# Altium PCB CR-10 Motherboard.PcbDoc (part 7 of 14)
Units mil, origin at the board's own origin, x right, y up, seen from the top; angles counter-clockwise.
Board outline 3970.48 x 2769.68 mil, 2 copper layers (TopLayer, BottomLayer); 147 components, 128 nets, 667 pads, 614 vias.
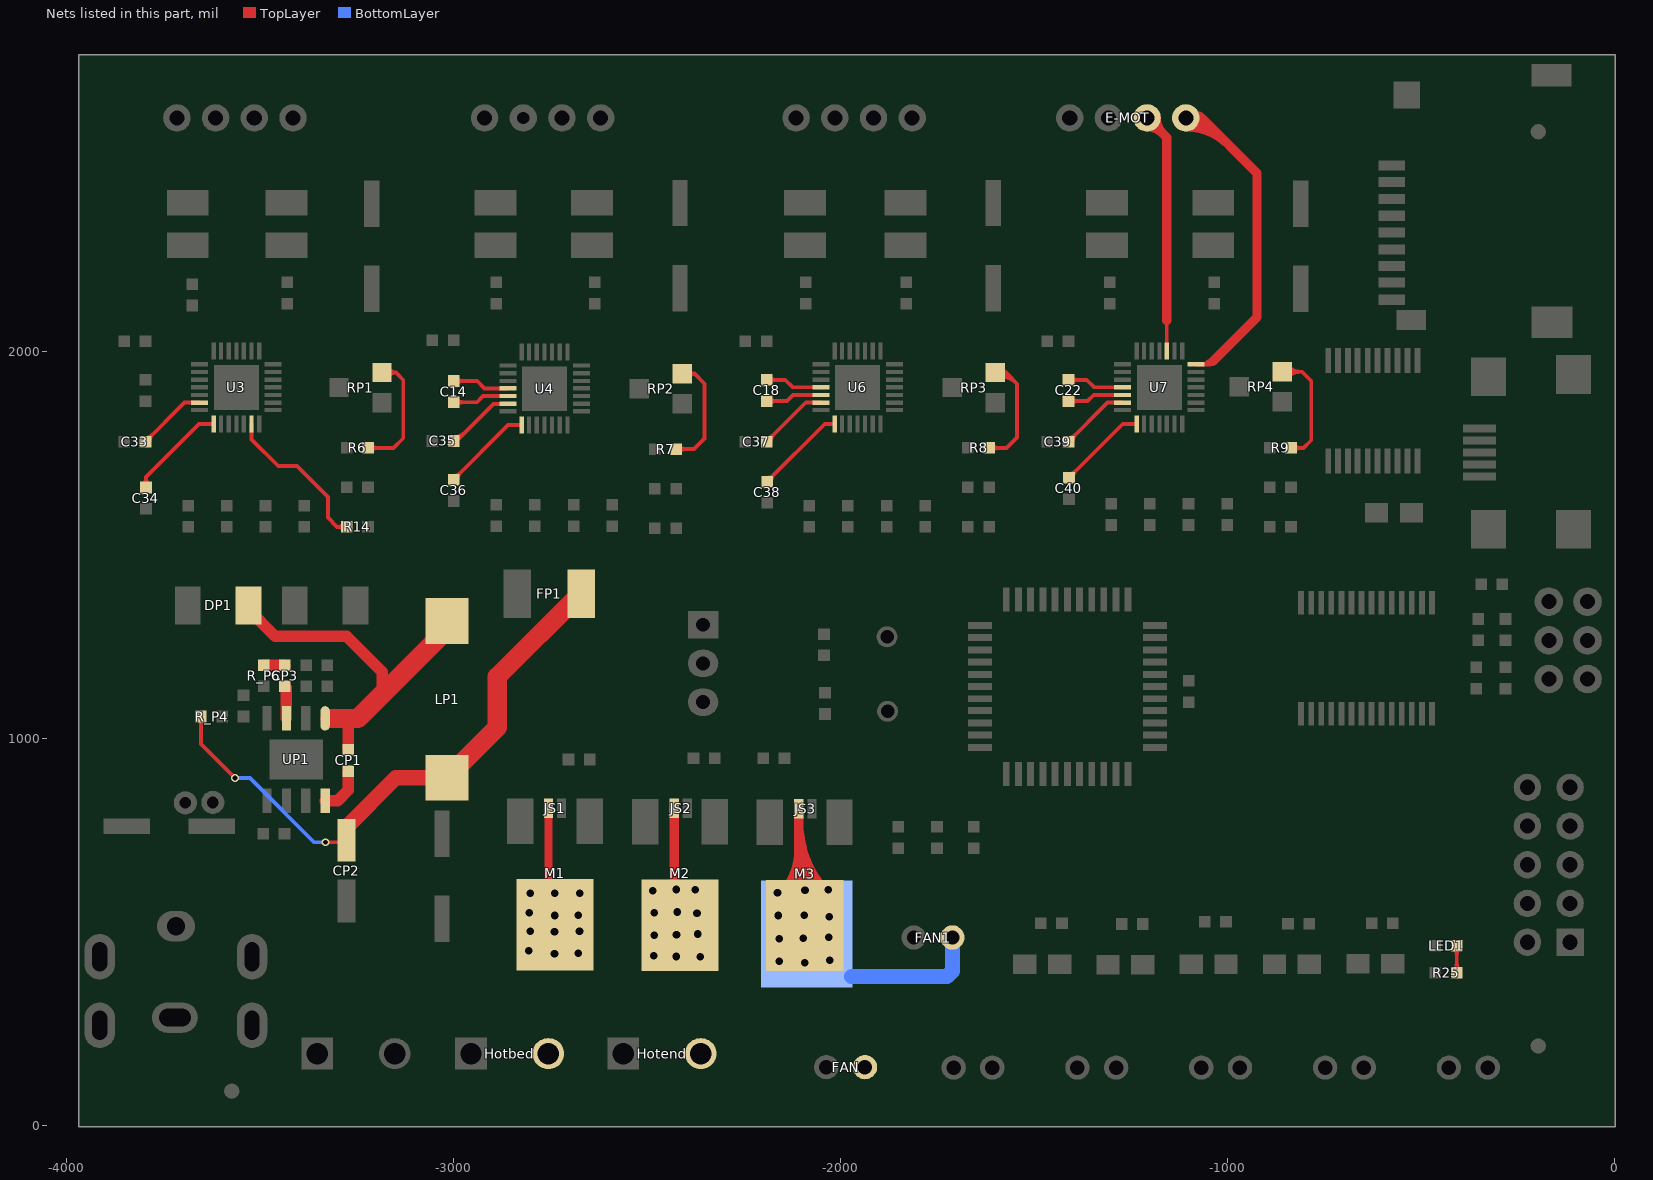
[diagram p7: the nets of this part, all layers, seen from the top]

## Via types
v1: diameter 28, hole 18, TopLayer to BottomLayer, tented both sides, 246 vias
v2: diameter 27.56, hole 19.68, TopLayer to BottomLayer, tented both sides, 196 vias
v3: diameter 20, hole 12, TopLayer to BottomLayer, tented both sides, 124 vias
v4: diameter 27.56, hole 11.81, TopLayer to BottomLayer, tented bottom, 16 vias
v5: diameter 27.56, hole 19.68, TopLayer to BottomLayer, 16 vias
v6: diameter 20, hole 12, TopLayer to BottomLayer, 12 vias
v7: diameter 28, hole 11.81, TopLayer to BottomLayer, tented both sides, 4 vias

## Nets (pads, with @x,y where several pads share a name; then routed paths per layer and width w, separated by ;. In a path a pad name is that pad's centre, name@x,y a point inside that pad or via, vN(x,y) a via of type N, cw(c..) or ccw(c..) an arc to the next point about the centre after c; other vN are vias at no path point) (continued)
NetC14_1: C14.1 U4.4 | length 489.2
  TopLayer w10: C14.1@-2999.54,1924.84 -2938.54,1924.84 -2919.54,1905.84 U4.4@-2859.54,1905.84 ; C14.1@-2992.46,1917.77 cw(c-2975.39,1900.7) -2975.39,1924.84 ; C14.1@-2992.46,1917.77 cw(c-2975.39,1900.7) -2975.39,1924.84 ; C14.1@-2992.46,1917.77 cw(c-2975.39,1900.7) -2975.39,1924.84 ; C14.1@-2992.46,1917.77 cw(c-2975.39,1900.7) -2975.39,1924.84 ; C14.1@-2992.46,1917.77 cw(c-2975.39,1900.7) -2975.39,1924.84 ; C14.1@-2992.46,1917.77 cw(c-2975.39,1900.7) -2975.39,1924.84 ; C14.1@-2992.46,1917.77 cw(c-2975.39,1900.7) -2975.39,1924.84 ; C14.1@-2992.46,1917.77 cw(c-2975.39,1900.7) -2975.39,1924.84 ; C14.1@-2992.46,1917.77 cw(c-2975.39,1900.7) -2975.39,1924.84 ; C14.1@-2992.46,1931.91 ccw(c-2975.39,1948.98) -2975.39,1924.84 ; C14.1@-2992.46,1931.91 ccw(c-2975.39,1948.98) -2975.39,1924.84 ; C14.1@-2992.46,1931.91 ccw(c-2975.39,1948.98) -2975.39,1924.84 ; C14.1@-2992.46,1931.91 ccw(c-2975.39,1948.98) -2975.39,1924.84 ; C14.1@-2992.46,1931.91 ccw(c-2975.39,1948.98) -2975.39,1924.84 ; C14.1@-2992.46,1931.91 ccw(c-2975.39,1948.98) -2975.39,1924.84 ; C14.1@-2992.46,1931.91 ccw(c-2975.39,1948.98) -2975.39,1924.84 ; C14.1@-2992.46,1931.91 ccw(c-2975.39,1948.98) -2975.39,1924.84 ; C14.1@-2992.46,1931.91 ccw(c-2975.39,1948.98) -2975.39,1924.84
NetC14_2: C14.2 U4.5 | length 487.9
  TopLayer w10: C14.2@-2999.54,1869.84 -2939.54,1869.84 -2923.54,1885.84 U4.5@-2859.54,1885.84 ; C14.2@-2992.46,1862.77 cw(c-2975.39,1845.7) -2975.39,1869.84 ; C14.2@-2992.46,1862.77 cw(c-2975.39,1845.7) -2975.39,1869.84 ; C14.2@-2992.46,1862.77 cw(c-2975.39,1845.7) -2975.39,1869.84 ; C14.2@-2992.46,1862.77 cw(c-2975.39,1845.7) -2975.39,1869.84 ; C14.2@-2992.46,1862.77 cw(c-2975.39,1845.7) -2975.39,1869.84 ; C14.2@-2992.46,1862.77 cw(c-2975.39,1845.7) -2975.39,1869.84 ; C14.2@-2992.46,1862.77 cw(c-2975.39,1845.7) -2975.39,1869.84 ; C14.2@-2992.46,1862.77 cw(c-2975.39,1845.7) -2975.39,1869.84 ; C14.2@-2992.46,1862.77 cw(c-2975.39,1845.7) -2975.39,1869.84 ; C14.2@-2992.46,1876.91 ccw(c-2975.39,1893.98) -2975.39,1869.84 ; C14.2@-2992.46,1876.91 ccw(c-2975.39,1893.98) -2975.39,1869.84 ; C14.2@-2992.46,1876.91 ccw(c-2975.39,1893.98) -2975.39,1869.84 ; C14.2@-2992.46,1876.91 ccw(c-2975.39,1893.98) -2975.39,1869.84 ; C14.2@-2992.46,1876.91 ccw(c-2975.39,1893.98) -2975.39,1869.84 ; C14.2@-2992.46,1876.91 ccw(c-2975.39,1893.98) -2975.39,1869.84 ; C14.2@-2992.46,1876.91 ccw(c-2975.39,1893.98) -2975.39,1869.84 ; C14.2@-2992.46,1876.91 ccw(c-2975.39,1893.98) -2975.39,1869.84 ; C14.2@-2992.46,1876.91 ccw(c-2975.39,1893.98) -2975.39,1869.84
NetC18_1: C18.1 U6.4 | length 489.2
  TopLayer w10: C18.1@-2190.62,1927.88 -2142.57,1927.88 -2123.57,1908.88 U6.4@-2050.62,1908.88 ; C18.1@-2183.55,1920.81 cw(c-2166.48,1903.74) -2166.48,1927.88 ; C18.1@-2183.55,1920.81 cw(c-2166.48,1903.74) -2166.48,1927.88 ; C18.1@-2183.55,1920.81 cw(c-2166.48,1903.74) -2166.48,1927.88 ; C18.1@-2183.55,1920.81 cw(c-2166.48,1903.74) -2166.48,1927.88 ; C18.1@-2183.55,1920.81 cw(c-2166.48,1903.74) -2166.48,1927.88 ; C18.1@-2183.55,1920.81 cw(c-2166.48,1903.74) -2166.48,1927.88 ; C18.1@-2183.55,1920.81 cw(c-2166.48,1903.74) -2166.48,1927.88 ; C18.1@-2183.55,1920.81 cw(c-2166.48,1903.74) -2166.48,1927.88 ; C18.1@-2183.55,1920.81 cw(c-2166.48,1903.74) -2166.48,1927.88 ; C18.1@-2183.55,1934.95 ccw(c-2166.48,1952.02) -2166.48,1927.88 ; C18.1@-2183.55,1934.95 ccw(c-2166.48,1952.02) -2166.48,1927.88 ; C18.1@-2183.55,1934.95 ccw(c-2166.48,1952.02) -2166.48,1927.88 ; C18.1@-2183.55,1934.95 ccw(c-2166.48,1952.02) -2166.48,1927.88 ; C18.1@-2183.55,1934.95 ccw(c-2166.48,1952.02) -2166.48,1927.88 ; C18.1@-2183.55,1934.95 ccw(c-2166.48,1952.02) -2166.48,1927.88 ; C18.1@-2183.55,1934.95 ccw(c-2166.48,1952.02) -2166.48,1927.88 ; C18.1@-2183.55,1934.95 ccw(c-2166.48,1952.02) -2166.48,1927.88 ; C18.1@-2183.55,1934.95 ccw(c-2166.48,1952.02) -2166.48,1927.88
NetC18_2: C18.2 U6.5 | length 487.9
  TopLayer w10: C18.2@-2190.62,1872.88 -2138.5,1872.88 -2122.5,1888.88 U6.5@-2050.62,1888.88 ; C18.2@-2183.55,1865.81 cw(c-2166.48,1848.74) -2166.48,1872.88 ; C18.2@-2183.55,1865.81 cw(c-2166.48,1848.74) -2166.48,1872.88 ; C18.2@-2183.55,1865.81 cw(c-2166.48,1848.74) -2166.48,1872.88 ; C18.2@-2183.55,1865.81 cw(c-2166.48,1848.74) -2166.48,1872.88 ; C18.2@-2183.55,1865.81 cw(c-2166.48,1848.74) -2166.48,1872.88 ; C18.2@-2183.55,1865.81 cw(c-2166.48,1848.74) -2166.48,1872.88 ; C18.2@-2183.55,1865.81 cw(c-2166.48,1848.74) -2166.48,1872.88 ; C18.2@-2183.55,1865.81 cw(c-2166.48,1848.74) -2166.48,1872.88 ; C18.2@-2183.55,1865.81 cw(c-2166.48,1848.74) -2166.48,1872.88 ; C18.2@-2183.55,1879.95 ccw(c-2166.48,1897.02) -2166.48,1872.88 ; C18.2@-2183.55,1879.95 ccw(c-2166.48,1897.02) -2166.48,1872.88 ; C18.2@-2183.55,1879.95 ccw(c-2166.48,1897.02) -2166.48,1872.88 ; C18.2@-2183.55,1879.95 ccw(c-2166.48,1897.02) -2166.48,1872.88 ; C18.2@-2183.55,1879.95 ccw(c-2166.48,1897.02) -2166.48,1872.88 ; C18.2@-2183.55,1879.95 ccw(c-2166.48,1897.02) -2166.48,1872.88 ; C18.2@-2183.55,1879.95 ccw(c-2166.48,1897.02) -2166.48,1872.88 ; C18.2@-2183.55,1879.95 ccw(c-2166.48,1897.02) -2166.48,1872.88 ; C18.2@-2183.55,1879.95 ccw(c-2166.48,1897.02) -2166.48,1872.88
NetC22_1: C22.1 U7.4 | length 489.2
  TopLayer w10: C22.1@-1410.62,1927.88 -1363.57,1927.88 -1344.57,1908.88 U7.4@-1270.62,1908.88 ; C22.1@-1403.55,1920.81 cw(c-1386.48,1903.74) -1386.48,1927.88 ; C22.1@-1403.55,1920.81 cw(c-1386.48,1903.74) -1386.48,1927.88 ; C22.1@-1403.55,1920.81 cw(c-1386.48,1903.74) -1386.48,1927.88 ; C22.1@-1403.55,1920.81 cw(c-1386.48,1903.74) -1386.48,1927.88 ; C22.1@-1403.55,1920.81 cw(c-1386.48,1903.74) -1386.48,1927.88 ; C22.1@-1403.55,1920.81 cw(c-1386.48,1903.74) -1386.48,1927.88 ; C22.1@-1403.55,1920.81 cw(c-1386.48,1903.74) -1386.48,1927.88 ; C22.1@-1403.55,1920.81 cw(c-1386.48,1903.74) -1386.48,1927.88 ; C22.1@-1403.55,1920.81 cw(c-1386.48,1903.74) -1386.48,1927.88 ; C22.1@-1403.55,1934.95 ccw(c-1386.48,1952.02) -1386.48,1927.88 ; C22.1@-1403.55,1934.95 ccw(c-1386.48,1952.02) -1386.48,1927.88 ; C22.1@-1403.55,1934.95 ccw(c-1386.48,1952.02) -1386.48,1927.88 ; C22.1@-1403.55,1934.95 ccw(c-1386.48,1952.02) -1386.48,1927.88 ; C22.1@-1403.55,1934.95 ccw(c-1386.48,1952.02) -1386.48,1927.88 ; C22.1@-1403.55,1934.95 ccw(c-1386.48,1952.02) -1386.48,1927.88 ; C22.1@-1403.55,1934.95 ccw(c-1386.48,1952.02) -1386.48,1927.88 ; C22.1@-1403.55,1934.95 ccw(c-1386.48,1952.02) -1386.48,1927.88 ; C22.1@-1403.55,1934.95 ccw(c-1386.48,1952.02) -1386.48,1927.88
NetC22_2: C22.2 U7.5 | length 487.9
  TopLayer w10: C22.2@-1410.62,1872.88 -1361.5,1872.88 -1345.5,1888.88 U7.5@-1270.62,1888.88 ; C22.2@-1403.55,1865.81 cw(c-1386.48,1848.74) -1386.48,1872.88 ; C22.2@-1403.55,1865.81 cw(c-1386.48,1848.74) -1386.48,1872.88 ; C22.2@-1403.55,1865.81 cw(c-1386.48,1848.74) -1386.48,1872.88 ; C22.2@-1403.55,1865.81 cw(c-1386.48,1848.74) -1386.48,1872.88 ; C22.2@-1403.55,1865.81 cw(c-1386.48,1848.74) -1386.48,1872.88 ; C22.2@-1403.55,1865.81 cw(c-1386.48,1848.74) -1386.48,1872.88 ; C22.2@-1403.55,1865.81 cw(c-1386.48,1848.74) -1386.48,1872.88 ; C22.2@-1403.55,1865.81 cw(c-1386.48,1848.74) -1386.48,1872.88 ; C22.2@-1403.55,1865.81 cw(c-1386.48,1848.74) -1386.48,1872.88 ; C22.2@-1403.55,1879.95 ccw(c-1386.48,1897.02) -1386.48,1872.88 ; C22.2@-1403.55,1879.95 ccw(c-1386.48,1897.02) -1386.48,1872.88 ; C22.2@-1403.55,1879.95 ccw(c-1386.48,1897.02) -1386.48,1872.88 ; C22.2@-1403.55,1879.95 ccw(c-1386.48,1897.02) -1386.48,1872.88 ; C22.2@-1403.55,1879.95 ccw(c-1386.48,1897.02) -1386.48,1872.88 ; C22.2@-1403.55,1879.95 ccw(c-1386.48,1897.02) -1386.48,1872.88 ; C22.2@-1403.55,1879.95 ccw(c-1386.48,1897.02) -1386.48,1872.88 ; C22.2@-1403.55,1879.95 ccw(c-1386.48,1897.02) -1386.48,1872.88 ; C22.2@-1403.55,1879.95 ccw(c-1386.48,1897.02) -1386.48,1872.88
NetC33_1: C33.1 U3.6 | length 525.1
  TopLayer w10: C33.1@-3793.62,1767.88 C33.1@-3795.62,1767.88 -3694.62,1868.88 U3.6@-3655.62,1868.88 ; C33.1@-3795.62,1777.88 ccw(c-3795.62,1802.02) -3778.55,1784.95 ; C33.1@-3795.62,1777.88 ccw(c-3795.62,1802.02) -3778.55,1784.95 ; C33.1@-3795.62,1777.88 ccw(c-3795.62,1802.02) -3778.55,1784.95 ; C33.1@-3795.62,1777.88 ccw(c-3795.62,1802.02) -3778.55,1784.95 ; C33.1@-3795.62,1777.88 ccw(c-3795.62,1802.02) -3778.55,1784.95 ; C33.1@-3795.62,1777.88 ccw(c-3795.62,1802.02) -3778.55,1784.95 ; C33.1@-3795.62,1777.88 ccw(c-3795.62,1802.02) -3778.55,1784.95 ; C33.1@-3795.62,1777.88 ccw(c-3795.62,1802.02) -3778.55,1784.95 ; C33.1@-3795.62,1777.88 ccw(c-3795.62,1802.02) -3778.55,1784.95 ; C33.1@-3785.62,1767.88 cw(c-3761.48,1767.88) -3778.55,1784.95 ; C33.1@-3785.62,1767.88 cw(c-3761.48,1767.88) -3778.55,1784.95 ; C33.1@-3785.62,1767.88 cw(c-3761.48,1767.88) -3778.55,1784.95 ; C33.1@-3785.62,1767.88 cw(c-3761.48,1767.88) -3778.55,1784.95 ; C33.1@-3785.62,1767.88 cw(c-3761.48,1767.88) -3778.55,1784.95 ; C33.1@-3785.62,1767.88 cw(c-3761.48,1767.88) -3778.55,1784.95 ; C33.1@-3785.62,1767.88 cw(c-3761.48,1767.88) -3778.55,1784.95 ; C33.1@-3785.62,1767.88 cw(c-3761.48,1767.88) -3778.55,1784.95 ; C33.1@-3785.62,1767.88 cw(c-3761.48,1767.88) -3778.55,1784.95
NetC34_1: C34.1 U3.8 | length 600
  TopLayer w10: C34.1@-3794.45,1649.8 -3794.45,1676.93 -3657.5,1813.88 U3.8@-3619.62,1813.88 ; C34.1@-3801.52,1656.87 ccw(c-3818.59,1673.95) -3794.45,1673.95 ; C34.1@-3801.52,1656.87 ccw(c-3818.59,1673.95) -3794.45,1673.95 ; C34.1@-3801.52,1656.87 ccw(c-3818.59,1673.95) -3794.45,1673.95 ; C34.1@-3801.52,1656.87 ccw(c-3818.59,1673.95) -3794.45,1673.95 ; C34.1@-3801.52,1656.87 ccw(c-3818.59,1673.95) -3794.45,1673.95 ; C34.1@-3801.52,1656.87 ccw(c-3818.59,1673.95) -3794.45,1673.95 ; C34.1@-3801.52,1656.87 ccw(c-3818.59,1673.95) -3794.45,1673.95 ; C34.1@-3801.52,1656.87 ccw(c-3818.59,1673.95) -3794.45,1673.95 ; C34.1@-3801.52,1656.87 ccw(c-3818.59,1673.95) -3794.45,1673.95 ; -3794.45,1673.95 ccw(c-3770.31,1673.95) C34.1@-3787.38,1656.87 ; -3794.45,1673.95 ccw(c-3770.31,1673.95) C34.1@-3787.38,1656.87 ; -3794.45,1673.95 ccw(c-3770.31,1673.95) C34.1@-3787.38,1656.87 ; -3794.45,1673.95 ccw(c-3770.31,1673.95) C34.1@-3787.38,1656.87 ; -3794.45,1673.95 ccw(c-3770.31,1673.95) C34.1@-3787.38,1656.87 ; -3794.45,1673.95 ccw(c-3770.31,1673.95) C34.1@-3787.38,1656.87 ; -3794.45,1673.95 ccw(c-3770.31,1673.95) C34.1@-3787.38,1656.87 ; -3794.45,1673.95 ccw(c-3770.31,1673.95) C34.1@-3787.38,1656.87 ; -3794.45,1673.95 ccw(c-3770.31,1673.95) C34.1@-3787.38,1656.87
NetC35_1: C35.1 U4.6 | length 469.9
  TopLayer w10: C35.1@-2999.54,1769.84 -2992.54,1769.84 -2896.54,1865.84 U4.6@-2859.54,1865.84 ; C35.1@-2999.54,1779.84 ccw(c-2999.54,1820.88) -2970.51,1791.86 ; C35.1@-2999.54,1779.84 ccw(c-2999.54,1820.88) -2970.51,1791.86 ; C35.1@-2999.54,1779.84 ccw(c-2999.54,1820.88) -2970.51,1791.86 ; C35.1@-2999.54,1779.84 ccw(c-2999.54,1820.88) -2970.51,1791.86 ; C35.1@-2999.54,1779.84 ccw(c-2999.54,1820.88) -2970.51,1791.86 ; C35.1@-2999.54,1779.84 ccw(c-2999.54,1820.88) -2970.51,1791.86 ; C35.1@-2999.54,1779.84 ccw(c-2999.54,1820.88) -2970.51,1791.86 ; C35.1@-2999.54,1779.84 ccw(c-2999.54,1820.88) -2970.51,1791.86 ; C35.1@-2999.54,1779.84 ccw(c-2999.54,1820.88) -2970.51,1791.86
NetC36_1: C36.1 U4.8 | length 575.7
  TopLayer w10: C36.1@-2999.54,1669.84 -2858.54,1810.84 U4.8@-2823.54,1810.84 ; C36.1@-2999.54,1679.84 ccw(c-2999.54,1703.98) -2982.46,1686.91 ; C36.1@-2999.54,1679.84 ccw(c-2999.54,1703.98) -2982.46,1686.91 ; C36.1@-2999.54,1679.84 ccw(c-2999.54,1703.98) -2982.46,1686.91 ; C36.1@-2999.54,1679.84 ccw(c-2999.54,1703.98) -2982.46,1686.91 ; C36.1@-2999.54,1679.84 ccw(c-2999.54,1703.98) -2982.46,1686.91 ; C36.1@-2999.54,1679.84 ccw(c-2999.54,1703.98) -2982.46,1686.91 ; C36.1@-2999.54,1679.84 ccw(c-2999.54,1703.98) -2982.46,1686.91 ; C36.1@-2999.54,1679.84 ccw(c-2999.54,1703.98) -2982.46,1686.91 ; C36.1@-2999.54,1679.84 ccw(c-2999.54,1703.98) -2982.46,1686.91 ; C36.1@-2989.54,1669.84 cw(c-2965.39,1669.84) -2982.46,1686.91 ; C36.1@-2989.54,1669.84 cw(c-2965.39,1669.84) -2982.46,1686.91 ; C36.1@-2989.54,1669.84 cw(c-2965.39,1669.84) -2982.46,1686.91 ; C36.1@-2989.54,1669.84 cw(c-2965.39,1669.84) -2982.46,1686.91 ; C36.1@-2989.54,1669.84 cw(c-2965.39,1669.84) -2982.46,1686.91 ; C36.1@-2989.54,1669.84 cw(c-2965.39,1669.84) -2982.46,1686.91 ; C36.1@-2989.54,1669.84 cw(c-2965.39,1669.84) -2982.46,1686.91 ; C36.1@-2989.54,1669.84 cw(c-2965.39,1669.84) -2982.46,1686.91 ; C36.1@-2989.54,1669.84 cw(c-2965.39,1669.84) -2982.46,1686.91
NetC37_1: C37.1 U6.6 | length 523.1
  TopLayer w10: C37.1@-2190.62,1767.88 -2089.62,1868.88 U6.6@-2050.62,1868.88 ; C37.1@-2190.62,1777.88 ccw(c-2190.62,1802.02) -2173.55,1784.95 ; C37.1@-2190.62,1777.88 ccw(c-2190.62,1802.02) -2173.55,1784.95 ; C37.1@-2190.62,1777.88 ccw(c-2190.62,1802.02) -2173.55,1784.95 ; C37.1@-2190.62,1777.88 ccw(c-2190.62,1802.02) -2173.55,1784.95 ; C37.1@-2190.62,1777.88 ccw(c-2190.62,1802.02) -2173.55,1784.95 ; C37.1@-2190.62,1777.88 ccw(c-2190.62,1802.02) -2173.55,1784.95 ; C37.1@-2190.62,1777.88 ccw(c-2190.62,1802.02) -2173.55,1784.95 ; C37.1@-2190.62,1777.88 ccw(c-2190.62,1802.02) -2173.55,1784.95 ; C37.1@-2190.62,1777.88 ccw(c-2190.62,1802.02) -2173.55,1784.95 ; C37.1@-2180.62,1767.88 cw(c-2156.48,1767.88) -2173.55,1784.95 ; C37.1@-2180.62,1767.88 cw(c-2156.48,1767.88) -2173.55,1784.95 ; C37.1@-2180.62,1767.88 cw(c-2156.48,1767.88) -2173.55,1784.95 ; C37.1@-2180.62,1767.88 cw(c-2156.48,1767.88) -2173.55,1784.95 ; C37.1@-2180.62,1767.88 cw(c-2156.48,1767.88) -2173.55,1784.95 ; C37.1@-2180.62,1767.88 cw(c-2156.48,1767.88) -2173.55,1784.95 ; C37.1@-2180.62,1767.88 cw(c-2156.48,1767.88) -2173.55,1784.95 ; C37.1@-2180.62,1767.88 cw(c-2156.48,1767.88) -2173.55,1784.95 ; C37.1@-2180.62,1767.88 cw(c-2156.48,1767.88) -2173.55,1784.95
NetC38_1: C38.1 U6.8 | length 576.4
  TopLayer w10: C38.1@-2189.54,1664.84 -2040.5,1813.88 U6.8@-2016.12,1813.88 ; C38.1@-2189.54,1674.84 ccw(c-2189.54,1698.98) -2172.46,1681.91 ; C38.1@-2189.54,1674.84 ccw(c-2189.54,1698.98) -2172.46,1681.91 ; C38.1@-2189.54,1674.84 ccw(c-2189.54,1698.98) -2172.46,1681.91 ; C38.1@-2189.54,1674.84 ccw(c-2189.54,1698.98) -2172.46,1681.91 ; C38.1@-2189.54,1674.84 ccw(c-2189.54,1698.98) -2172.46,1681.91 ; C38.1@-2189.54,1674.84 ccw(c-2189.54,1698.98) -2172.46,1681.91 ; C38.1@-2189.54,1674.84 ccw(c-2189.54,1698.98) -2172.46,1681.91 ; C38.1@-2189.54,1674.84 ccw(c-2189.54,1698.98) -2172.46,1681.91 ; C38.1@-2189.54,1674.84 ccw(c-2189.54,1698.98) -2172.46,1681.91 ; C38.1@-2179.54,1664.84 cw(c-2155.39,1664.84) -2172.46,1681.91 ; C38.1@-2179.54,1664.84 cw(c-2155.39,1664.84) -2172.46,1681.91 ; C38.1@-2179.54,1664.84 cw(c-2155.39,1664.84) -2172.46,1681.91 ; C38.1@-2179.54,1664.84 cw(c-2155.39,1664.84) -2172.46,1681.91 ; C38.1@-2179.54,1664.84 cw(c-2155.39,1664.84) -2172.46,1681.91 ; C38.1@-2179.54,1664.84 cw(c-2155.39,1664.84) -2172.46,1681.91 ; C38.1@-2179.54,1664.84 cw(c-2155.39,1664.84) -2172.46,1681.91 ; C38.1@-2179.54,1664.84 cw(c-2155.39,1664.84) -2172.46,1681.91 ; C38.1@-2179.54,1664.84 cw(c-2155.39,1664.84) -2172.46,1681.91
NetC39_1: C39.1 U7.6 | length 523.1
  TopLayer w10: C39.1@-1410.62,1767.88 -1309.62,1868.88 U7.6@-1270.62,1868.88 ; C39.1@-1410.62,1777.88 ccw(c-1410.62,1802.02) -1393.55,1784.95 ; C39.1@-1410.62,1777.88 ccw(c-1410.62,1802.02) -1393.55,1784.95 ; C39.1@-1410.62,1777.88 ccw(c-1410.62,1802.02) -1393.55,1784.95 ; C39.1@-1410.62,1777.88 ccw(c-1410.62,1802.02) -1393.55,1784.95 ; C39.1@-1410.62,1777.88 ccw(c-1410.62,1802.02) -1393.55,1784.95 ; C39.1@-1410.62,1777.88 ccw(c-1410.62,1802.02) -1393.55,1784.95 ; C39.1@-1410.62,1777.88 ccw(c-1410.62,1802.02) -1393.55,1784.95 ; C39.1@-1410.62,1777.88 ccw(c-1410.62,1802.02) -1393.55,1784.95 ; C39.1@-1410.62,1777.88 ccw(c-1410.62,1802.02) -1393.55,1784.95 ; C39.1@-1400.62,1767.88 cw(c-1376.48,1767.88) -1393.55,1784.95 ; C39.1@-1400.62,1767.88 cw(c-1376.48,1767.88) -1393.55,1784.95 ; C39.1@-1400.62,1767.88 cw(c-1376.48,1767.88) -1393.55,1784.95 ; C39.1@-1400.62,1767.88 cw(c-1376.48,1767.88) -1393.55,1784.95 ; C39.1@-1400.62,1767.88 cw(c-1376.48,1767.88) -1393.55,1784.95 ; C39.1@-1400.62,1767.88 cw(c-1376.48,1767.88) -1393.55,1784.95 ; C39.1@-1400.62,1767.88 cw(c-1376.48,1767.88) -1393.55,1784.95 ; C39.1@-1400.62,1767.88 cw(c-1376.48,1767.88) -1393.55,1784.95 ; C39.1@-1400.62,1767.88 cw(c-1376.48,1767.88) -1393.55,1784.95
NetC40_1: C40.1 U7.8 | length 572.2
  TopLayer w10: C40.1@-1409.45,1674.8 -1270.37,1813.88 U7.8@-1236.12,1813.88 ; C40.1@-1409.45,1684.8 ccw(c-1409.45,1708.95) -1392.38,1691.87 ; C40.1@-1409.45,1684.8 ccw(c-1409.45,1708.95) -1392.38,1691.87 ; C40.1@-1409.45,1684.8 ccw(c-1409.45,1708.95) -1392.38,1691.87 ; C40.1@-1409.45,1684.8 ccw(c-1409.45,1708.95) -1392.38,1691.87 ; C40.1@-1409.45,1684.8 ccw(c-1409.45,1708.95) -1392.38,1691.87 ; C40.1@-1409.45,1684.8 ccw(c-1409.45,1708.95) -1392.38,1691.87 ; C40.1@-1409.45,1684.8 ccw(c-1409.45,1708.95) -1392.38,1691.87 ; C40.1@-1409.45,1684.8 ccw(c-1409.45,1708.95) -1392.38,1691.87 ; C40.1@-1409.45,1684.8 ccw(c-1409.45,1708.95) -1392.38,1691.87 ; C40.1@-1399.45,1674.8 cw(c-1375.31,1674.8) -1392.38,1691.87 ; C40.1@-1399.45,1674.8 cw(c-1375.31,1674.8) -1392.38,1691.87 ; C40.1@-1399.45,1674.8 cw(c-1375.31,1674.8) -1392.38,1691.87 ; C40.1@-1399.45,1674.8 cw(c-1375.31,1674.8) -1392.38,1691.87 ; C40.1@-1399.45,1674.8 cw(c-1375.31,1674.8) -1392.38,1691.87 ; C40.1@-1399.45,1674.8 cw(c-1375.31,1674.8) -1392.38,1691.87 ; C40.1@-1399.45,1674.8 cw(c-1375.31,1674.8) -1392.38,1691.87 ; C40.1@-1399.45,1674.8 cw(c-1375.31,1674.8) -1392.38,1691.87 ; C40.1@-1399.45,1674.8 cw(c-1375.31,1674.8) -1392.38,1691.87
NetCP1_1: CP1.1 UP1.8 | length 120.3
  TopLayer w30: UP1.8@-3331.54,840.54 -3298.83,840.54 -3271.54,867.84 CP1.1@-3271.54,916.84
NetCP1_2: CP1.2 DP1.2 LP1.2 UP1.1 | length 969.9
  TopLayer w30: DP1.2@-3529.06,1344.84 -3529.06,1333.36 -3460.54,1264.84 -3275.54,1264.84 -3183.54,1172.84 -3183.54,1115.84 ; CP1.2@-3271.54,971.84 -3271.54,1041.84
  TopLayer w50: -3318.54,1052.84 -3246.54,1052.84 -3183.54,1115.84 -3016.54,1282.84 LP1.2@-3016.54,1304.96
NetCP2_1: CP2.1 FP1.1 LP1.1 R_P4.2 | length 1512.6
  TopLayer w10: R_P4.2@-3652.54,1057.84 -3652.54,986.84 v3(-3564.54,898.84) ; v3(-3330.54,732.84) CP2.1@-3282.28,732.84
  TopLayer w40: CP2.1@-3276.54,738.58 -3276.54,771.84 -3148.54,899.84 LP1.1@-3016.54,899.84
  TopLayer w50: LP1.1@-3016.54,899.84 -2886.54,1029.84 -2886.54,1160.46 -2672,1375 FP1.1@-2670,1375
  BottomLayer w10: v3(-3564.54,898.84) -3525.54,898.84 -3359.54,732.84 v3(-3330.54,732.84)
NetCP3_1: CP3.1 R_P6.1 | length 55
  TopLayer w30: R_P6.1@-3490.54,1190.84 CP3.1@-3435.54,1190.84
NetCP3_2: CP3.2 UP1.3 | length 78.7
  TopLayer w30: UP1.3@-3431.54,1053.14 CP3.2@-3431.54,1131.84
NetE-MOT_3: E-MOT.3 U7.24 | length 1056.2
  TopLayer w10: U7.24@-1156.62,2017.56 -1156.62,2080.84
  TopLayer w23.62: E-MOT.3@-1207.49,2604.84 -1156.62,2553.98 -1156.62,2442.84 -1156.62,2080.84 ; E-MOT.3@-1207.49,2581.22 cw(c-1207.49,2524.19) -1167.16,2564.52 ; E-MOT.3@-1207.49,2581.22 cw(c-1207.49,2524.19) -1167.16,2564.52 ; E-MOT.3@-1207.49,2581.22 cw(c-1207.49,2524.19) -1167.16,2564.52 ; E-MOT.3@-1207.49,2581.22 cw(c-1207.49,2524.19) -1167.16,2564.52 ; E-MOT.3@-1207.49,2581.22 cw(c-1207.49,2524.19) -1167.16,2564.52 ; E-MOT.3@-1183.87,2604.84 ccw(c-1126.84,2604.84) -1167.16,2564.52 ; E-MOT.3@-1183.87,2604.84 ccw(c-1126.84,2604.84) -1167.16,2564.52 ; E-MOT.3@-1183.87,2604.84 ccw(c-1126.84,2604.84) -1167.16,2564.52 ; E-MOT.3@-1183.87,2604.84 ccw(c-1126.84,2604.84) -1167.16,2564.52 ; E-MOT.3@-1183.87,2604.84 ccw(c-1126.84,2604.84) -1167.16,2564.52
NetE-MOT_4: E-MOT.4 U7.21 | length 2198.1
  TopLayer w10: U7.21@-1080.62,1967.88 -1044.54,1967.88 ccw(c-1045.02,1978.23) -1034.67,1978.71 ; -1056.54,1967.88 cw(c-1044.05,1962.36) -1038.54,1974.84
  TopLayer w23.62: E-MOT.4@-1092.47,2586.61 cw(c-1070.5,2559.93) -1046.06,2584.37 ; -1064.46,2602.77 ccw(c-1087.12,2580.11) E-MOT.4@-1107.49,2604.84 ; -1038.54,1974.84 -923.54,2089.84 -923.54,2413.84 -923.54,2461.84 -1066.54,2604.84 ; E-MOT.4@-1107.49,2581.22 cw(c-1107.49,2425.32) -997.25,2535.56 ; E-MOT.4@-1107.49,2581.22 cw(c-1107.49,2425.32) -997.25,2535.56 ; E-MOT.4@-1107.49,2581.22 cw(c-1107.49,2425.32) -997.25,2535.56 ; E-MOT.4@-1107.49,2581.22 cw(c-1107.49,2425.32) -997.25,2535.56 ; E-MOT.4@-1107.49,2581.22 cw(c-1107.49,2425.32) -997.25,2535.56 ; E-MOT.4@-1107.49,2604.84 cw(c-1107.49,2505.97) -1037.58,2575.88 ; E-MOT.4@-1107.49,2604.84 cw(c-1107.49,2505.97) -1037.58,2575.88 ; E-MOT.4@-1107.49,2604.84 cw(c-1107.49,2505.97) -1037.58,2575.88 ; E-MOT.4@-1107.49,2604.84 cw(c-1107.49,2505.97) -1037.58,2575.88 ; E-MOT.4@-1107.49,2604.84 cw(c-1107.49,2505.97) -1037.58,2575.88 ; E-MOT.4@-1107.49,2604.84 -1066.54,2604.84 ; E-MOT.4@-1087.04,2593.02 cw(c-1066.54,2581.16) -1066.54,2604.84 ; E-MOT.4@-1087.04,2593.02 cw(c-1066.54,2581.16) -1066.54,2604.84 ; E-MOT.4@-1087.04,2593.02 cw(c-1066.54,2581.16) -1066.54,2604.84 ; E-MOT.4@-1087.04,2593.02 cw(c-1066.54,2581.16) -1066.54,2604.84 ; E-MOT.4@-1087.04,2593.02 cw(c-1066.54,2581.16) -1066.54,2604.84 ; E-MOT.4@-1087.04,2616.67 ccw(c-1066.54,2628.53) -1066.54,2604.84 ; E-MOT.4@-1087.04,2616.67 ccw(c-1066.54,2628.53) -1066.54,2604.84 ; E-MOT.4@-1087.04,2616.67 ccw(c-1066.54,2628.53) -1066.54,2604.84 ; E-MOT.4@-1087.04,2616.67 ccw(c-1066.54,2628.53) -1066.54,2604.84 ; E-MOT.4@-1087.04,2616.67 ccw(c-1066.54,2628.53) -1066.54,2604.84
NetFAN1_1: FAN1.1 FAN.1 JS3.2 M3.2 pad.1@-2087.54,495.84 | length 7220.2
  TopLayer w10: M3.2@-2169.54,440.84 M3.2@-2092.54,517.84 ; M3.2@-2107.54,532.84 M3.2@-2022.54,447.84 ; M3.2@-2169.76,425.84 cw(c-2134.08,425.84) M3.2@-2159.31,451.07 ; M3.2@-2169.76,425.84 cw(c-2134.08,425.84) M3.2@-2159.31,451.07 ; M3.2@-2169.76,425.84 cw(c-2134.08,425.84) M3.2@-2159.31,451.07 ; M3.2@-2169.76,425.84 cw(c-2134.08,425.84) M3.2@-2159.31,451.07 ; M3.2@-2169.76,425.84 cw(c-2134.08,425.84) M3.2@-2159.31,451.07 ; M3.2@-2169.76,425.84 cw(c-2134.08,425.84) M3.2@-2159.31,451.07 ; M3.2@-2169.76,425.84 cw(c-2134.08,425.84) M3.2@-2159.31,451.07 ; M3.2@-2169.76,425.84 cw(c-2134.08,425.84) M3.2@-2159.31,451.07 ; M3.2@-2159.76,425.84 cw(c-2099.93,425.84) M3.2@-2142.23,468.14 ; M3.2@-2159.76,425.84 cw(c-2099.93,425.84) M3.2@-2142.23,468.14 ; M3.2@-2159.76,425.84 cw(c-2099.93,425.84) M3.2@-2142.23,468.14 ; M3.2@-2159.76,425.84 cw(c-2099.93,425.84) M3.2@-2142.23,468.14 ; M3.2@-2159.76,425.84 cw(c-2099.93,425.84) M3.2@-2142.23,468.14 ; M3.2@-2159.76,425.84 cw(c-2099.93,425.84) M3.2@-2142.23,468.14 ; M3.2@-2159.76,425.84 cw(c-2099.93,425.84) M3.2@-2142.23,468.14 ; M3.2@-2159.76,425.84 cw(c-2099.93,425.84) M3.2@-2142.23,468.14 ; M3.2@-2149.76,425.84 cw(c-2065.79,425.84) M3.2@-2125.16,485.21 ; M3.2@-2149.76,425.84 cw(c-2065.79,425.84) M3.2@-2125.16,485.21 ; M3.2@-2149.76,425.84 cw(c-2065.79,425.84) M3.2@-2125.16,485.21 ; M3.2@-2149.76,425.84 cw(c-2065.79,425.84) M3.2@-2125.16,485.21 ; M3.2@-2149.76,425.84 cw(c-2065.79,425.84) M3.2@-2125.16,485.21 ; M3.2@-2149.76,425.84 cw(c-2065.79,425.84) M3.2@-2125.16,485.21 ; M3.2@-2149.76,425.84 cw(c-2065.79,425.84) M3.2@-2125.16,485.21 ; M3.2@-2149.76,425.84 cw(c-2065.79,425.84) M3.2@-2125.16,485.21
  TopLayer w24: M3.2@-2107.54,532.84 JS3.2@-2107.54,819.84 ; M3.2@-2154.76,598.07 ccw(c-2268.77,712.08) -2107.54,712.08 ; M3.2@-2154.76,598.07 ccw(c-2268.77,712.08) -2107.54,712.08 ; M3.2@-2154.76,598.07 ccw(c-2268.77,712.08) -2107.54,712.08 ; M3.2@-2154.76,598.07 ccw(c-2268.77,712.08) -2107.54,712.08 ; M3.2@-2154.76,598.07 ccw(c-2268.77,712.08) -2107.54,712.08 ; M3.2@-2154.76,598.07 ccw(c-2268.77,712.08) -2107.54,712.08 ; M3.2@-2137.79,581.1 ccw(c-2210.83,654.14) -2107.54,654.14 ; M3.2@-2137.79,581.1 ccw(c-2210.83,654.14) -2107.54,654.14 ; M3.2@-2137.79,581.1 ccw(c-2210.83,654.14) -2107.54,654.14 ; M3.2@-2137.79,581.1 ccw(c-2210.83,654.14) -2107.54,654.14 ; M3.2@-2137.79,581.1 ccw(c-2210.83,654.14) -2107.54,654.14 ; M3.2@-2137.79,581.1 ccw(c-2210.83,654.14) -2107.54,654.14 ; M3.2@-2107.54,565.92 cw(c-2048.61,565.92) M3.2@-2090.28,607.58 ; M3.2@-2107.54,565.92 cw(c-2048.61,565.92) M3.2@-2090.28,607.58 ; M3.2@-2107.54,565.92 cw(c-2048.61,565.92) M3.2@-2090.28,607.58 ; M3.2@-2107.54,565.92 cw(c-2048.61,565.92) M3.2@-2090.28,607.58 ; M3.2@-2107.54,565.92 cw(c-2048.61,565.92) M3.2@-2090.28,607.58 ; M3.2@-2107.54,565.92 cw(c-2048.61,565.92) M3.2@-2090.28,607.58 ; M3.2@-2107.54,565.92 cw(c-2048.61,565.92) M3.2@-2090.28,607.58 ; M3.2@-2107.54,565.92 cw(c-2048.61,565.92) M3.2@-2090.28,607.58 ; M3.2@-2107.54,582.94 ccw(c-2055.44,582.94) M3.2@-2092.28,546.1 ; M3.2@-2107.54,582.94 ccw(c-2055.44,582.94) M3.2@-2092.28,546.1 ; M3.2@-2107.54,582.94 ccw(c-2055.44,582.94) M3.2@-2092.28,546.1 ; M3.2@-2107.54,582.94 ccw(c-2055.44,582.94) M3.2@-2092.28,546.1 ; M3.2@-2107.54,582.94 ccw(c-2055.44,582.94) M3.2@-2092.28,546.1 ; M3.2@-2107.54,582.94 ccw(c-2055.44,582.94) M3.2@-2092.28,546.1 ; M3.2@-2107.54,582.94 ccw(c-2055.44,582.94) M3.2@-2092.28,546.1 ; M3.2@-2107.54,582.94 ccw(c-2055.44,582.94) M3.2@-2092.28,546.1 ; -2107.54,651.77 ccw(c-2048.61,651.77) M3.2@-2090.28,610.1 ; -2107.54,651.77 ccw(c-2048.61,651.77) M3.2@-2090.28,610.1 ; -2107.54,651.77 ccw(c-2048.61,651.77) M3.2@-2090.28,610.1 ; -2107.54,651.77 ccw(c-2048.61,651.77) M3.2@-2090.28,610.1 ; -2107.54,651.77 ccw(c-2048.61,651.77) M3.2@-2090.28,610.1 ; -2107.54,651.77 ccw(c-2048.61,651.77) M3.2@-2090.28,610.1 ; -2107.54,651.77 ccw(c-2048.61,651.77) M3.2@-2090.28,610.1 ; -2107.54,651.77 ccw(c-2048.61,651.77) M3.2@-2090.28,610.1 ; -2107.54,668.62 ccw(c-1959.75,668.62) M3.2@-2064.25,564.13 ; -2107.54,668.62 ccw(c-1959.75,668.62) M3.2@-2064.25,564.13 ; -2107.54,668.62 ccw(c-1959.75,668.62) M3.2@-2064.25,564.13 ; -2107.54,668.62 ccw(c-1959.75,668.62) M3.2@-2064.25,564.13 ; -2107.54,668.62 ccw(c-1959.75,668.62) M3.2@-2064.25,564.13 ; -2107.54,668.62 ccw(c-1959.75,668.62) M3.2@-2064.25,564.13 ; -2107.54,726.57 ccw(c-1901.81,726.57) M3.2@-2047.28,581.1 ; -2107.54,726.57 ccw(c-1901.81,726.57) M3.2@-2047.28,581.1 ; -2107.54,726.57 ccw(c-1901.81,726.57) M3.2@-2047.28,581.1 ; -2107.54,726.57 ccw(c-1901.81,726.57) M3.2@-2047.28,581.1 ; -2107.54,726.57 ccw(c-1901.81,726.57) M3.2@-2047.28,581.1 ; -2107.54,726.57 ccw(c-1901.81,726.57) M3.2@-2047.28,581.1 ; -2107.54,784.51 ccw(c-1843.87,784.51) M3.2@-2030.31,598.07 ; -2107.54,784.51 ccw(c-1843.87,784.51) M3.2@-2030.31,598.07 ; -2107.54,784.51 ccw(c-1843.87,784.51) M3.2@-2030.31,598.07 ; -2107.54,784.51 ccw(c-1843.87,784.51) M3.2@-2030.31,598.07 ; -2107.54,784.51 ccw(c-1843.87,784.51) M3.2@-2030.31,598.07 ; -2107.54,784.51 ccw(c-1843.87,784.51) M3.2@-2030.31,598.07
  BottomLayer w39.37: pad.1@-1971.54,385.84 -1724.54,385.84 -1710.54,399.84 FAN1.1@-1710.54,486.84
  other v2: -2092.54,421.84 -2158.54,425.84 -2027.54,427.84 -2158.54,483.84 -2096.54,484.84 -2030.54,487.84 -2028.54,540.84 -2160.54,543.84 -2093.54,544.84 -2162.54,602.84 -2091.54,608.84 -2031.54,609.84
NetHotbed_1: Hotbed.1 JS1.2 M1.2 | length 308
  TopLayer w10: M1.2@-2754.54,536.84 M1.2@-2737.54,519.84
  TopLayer w20: M1.2@-2754.54,536.84 JS1.2@-2754.54,820.84
  other v2: -2738.9,445.2 -2677.9,446.2 -2804.9,452.2 -2738.9,502.2 -2801.54,502.84 -2674.26,502.84 -2738.54,543.84 -2677.54,544.84 -2804.54,550.84 -2738.54,600.84 -2801.17,601.48 -2673.9,601.48
NetHotend_1: Hotend.1 JS2.2 M2.2 | length 299.1
  TopLayer w10: M2.2@-2429.54,535.84 M2.2@-2419.54,525.84
  TopLayer w24: M2.2@-2429.54,535.84 JS2.2@-2429.54,820.84
  other v2: -2362.54,436.84 -2424.54,437.84 -2482.54,439.84 -2481.54,492.84 -2423.54,493.84 -2368.54,495.84 -2370.54,549.84 -2481.54,550.84 -2421.54,552.84 -2484.54,607.84 -2375.54,609.84 -2424.54,610.84
NetLED1_2: LED1.2 R25.1 | length 221.7
  TopLayer w10: R25.1@-407.54,395.84 LED1.2@-407.54,465.84 ; -407.54,419.98 cw(c-431.68,419.98) -414.61,402.91 ccw(c-431.68,419.98) -407.54,419.98 ; -407.54,419.98 ccw(c-383.39,419.98) -400.46,402.91 cw(c-383.39,419.98) -407.54,419.98 ; -407.54,441.7 cw(c-383.39,441.7) -400.46,458.77 ccw(c-383.39,441.7) -407.54,441.7 ; -407.54,441.7 ccw(c-431.68,441.7) -414.61,458.77 cw(c-431.68,441.7) -407.54,441.7
NetR6_1: R6.1 RP1.3 | length 1066.7
  TopLayer w10: R6.1@-3220.62,1751.88 -3154.5,1751.88 -3129.54,1776.84 -3129.54,1927.84 -3148.57,1946.88 ; RP1.3@-3184.62,1946.88 -3148.57,1946.88 ; R6.1@-3213.55,1744.81 cw(c-3196.48,1727.74) -3196.48,1751.88 ; R6.1@-3213.55,1744.81 cw(c-3196.48,1727.74) -3196.48,1751.88 ; R6.1@-3213.55,1744.81 cw(c-3196.48,1727.74) -3196.48,1751.88 ; R6.1@-3213.55,1744.81 cw(c-3196.48,1727.74) -3196.48,1751.88 ; R6.1@-3213.55,1744.81 cw(c-3196.48,1727.74) -3196.48,1751.88 ; R6.1@-3213.55,1744.81 cw(c-3196.48,1727.74) -3196.48,1751.88 ; R6.1@-3213.55,1744.81 cw(c-3196.48,1727.74) -3196.48,1751.88 ; R6.1@-3213.55,1744.81 cw(c-3196.48,1727.74) -3196.48,1751.88 ; R6.1@-3213.55,1744.81 cw(c-3196.48,1727.74) -3196.48,1751.88 ; R6.1@-3213.55,1758.95 ccw(c-3196.48,1776.02) -3196.48,1751.88 ; R6.1@-3213.55,1758.95 ccw(c-3196.48,1776.02) -3196.48,1751.88 ; R6.1@-3213.55,1758.95 ccw(c-3196.48,1776.02) -3196.48,1751.88 ; R6.1@-3213.55,1758.95 ccw(c-3196.48,1776.02) -3196.48,1751.88 ; R6.1@-3213.55,1758.95 ccw(c-3196.48,1776.02) -3196.48,1751.88 ; R6.1@-3213.55,1758.95 ccw(c-3196.48,1776.02) -3196.48,1751.88 ; R6.1@-3213.55,1758.95 ccw(c-3196.48,1776.02) -3196.48,1751.88 ; R6.1@-3213.55,1758.95 ccw(c-3196.48,1776.02) -3196.48,1751.88 ; R6.1@-3213.55,1758.95 ccw(c-3196.48,1776.02) -3196.48,1751.88 ; RP1.3@-3167.65,1936.3 cw(c-3148.58,1924.4) -3148.58,1946.88 ; RP1.3@-3167.65,1936.3 cw(c-3148.58,1924.4) -3148.58,1946.88 ; RP1.3@-3167.65,1936.3 cw(c-3148.58,1924.4) -3148.58,1946.88 ; RP1.3@-3167.65,1936.3 cw(c-3148.58,1924.4) -3148.58,1946.88 ; RP1.3@-3167.65,1936.3 cw(c-3148.58,1924.4) -3148.58,1946.88 ; RP1.3@-3167.65,1936.3 cw(c-3148.58,1924.4) -3148.58,1946.88 ; RP1.3@-3167.65,1936.3 cw(c-3148.58,1924.4) -3148.58,1946.88 ; RP1.3@-3167.65,1936.3 cw(c-3148.58,1924.4) -3148.58,1946.88 ; RP1.3@-3167.65,1936.3 cw(c-3148.58,1924.4) -3148.58,1946.88 ; RP1.3@-3167.65,1957.47 ccw(c-3148.58,1969.37) -3148.58,1946.88 ; RP1.3@-3167.65,1957.47 ccw(c-3148.58,1969.37) -3148.58,1946.88 ; RP1.3@-3167.65,1957.47 ccw(c-3148.58,1969.37) -3148.58,1946.88 ; RP1.3@-3167.65,1957.47 ccw(c-3148.58,1969.37) -3148.58,1946.88 ; RP1.3@-3167.65,1957.47 ccw(c-3148.58,1969.37) -3148.58,1946.88 ; RP1.3@-3167.65,1957.47 ccw(c-3148.58,1969.37) -3148.58,1946.88 ; RP1.3@-3167.65,1957.47 ccw(c-3148.58,1969.37) -3148.58,1946.88 ; RP1.3@-3167.65,1957.47 ccw(c-3148.58,1969.37) -3148.58,1946.88 ; RP1.3@-3167.65,1957.47 ccw(c-3148.58,1969.37) -3148.58,1946.88
NetR7_1: R7.1 RP2.3 | length 924.5
  TopLayer w10: R7.1@-2424.54,1748.84 -2378.54,1748.84 -2351.54,1775.84 -2351.54,1917.84 -2377.54,1943.84 ; RP2.3@-2408.54,1943.84 -2377.54,1943.84 ; R7.1@-2417.46,1741.77 cw(c-2400.39,1724.7) -2400.39,1748.84 ; R7.1@-2417.46,1741.77 cw(c-2400.39,1724.7) -2400.39,1748.84 ; R7.1@-2417.46,1741.77 cw(c-2400.39,1724.7) -2400.39,1748.84 ; R7.1@-2417.46,1741.77 cw(c-2400.39,1724.7) -2400.39,1748.84 ; R7.1@-2417.46,1741.77 cw(c-2400.39,1724.7) -2400.39,1748.84 ; R7.1@-2417.46,1741.77 cw(c-2400.39,1724.7) -2400.39,1748.84 ; R7.1@-2417.46,1741.77 cw(c-2400.39,1724.7) -2400.39,1748.84 ; R7.1@-2417.46,1741.77 cw(c-2400.39,1724.7) -2400.39,1748.84 ; R7.1@-2417.46,1741.77 cw(c-2400.39,1724.7) -2400.39,1748.84 ; R7.1@-2417.46,1755.91 ccw(c-2400.39,1772.98) -2400.39,1748.84 ; R7.1@-2417.46,1755.91 ccw(c-2400.39,1772.98) -2400.39,1748.84 ; R7.1@-2417.46,1755.91 ccw(c-2400.39,1772.98) -2400.39,1748.84 ; R7.1@-2417.46,1755.91 ccw(c-2400.39,1772.98) -2400.39,1748.84 ; R7.1@-2417.46,1755.91 ccw(c-2400.39,1772.98) -2400.39,1748.84 ; R7.1@-2417.46,1755.91 ccw(c-2400.39,1772.98) -2400.39,1748.84 ; R7.1@-2417.46,1755.91 ccw(c-2400.39,1772.98) -2400.39,1748.84 ; R7.1@-2417.46,1755.91 ccw(c-2400.39,1772.98) -2400.39,1748.84 ; R7.1@-2417.46,1755.91 ccw(c-2400.39,1772.98) -2400.39,1748.84 ; RP2.3@-2390.31,1935.6 cw(c-2377.54,1929.82) -2377.54,1943.84 ; RP2.3@-2390.31,1935.6 cw(c-2377.54,1929.82) -2377.54,1943.84 ; RP2.3@-2390.31,1935.6 cw(c-2377.54,1929.82) -2377.54,1943.84 ; RP2.3@-2390.31,1935.6 cw(c-2377.54,1929.82) -2377.54,1943.84 ; RP2.3@-2390.31,1935.6 cw(c-2377.54,1929.82) -2377.54,1943.84 ; RP2.3@-2390.31,1935.6 cw(c-2377.54,1929.82) -2377.54,1943.84 ; RP2.3@-2390.31,1935.6 cw(c-2377.54,1929.82) -2377.54,1943.84 ; RP2.3@-2390.31,1935.6 cw(c-2377.54,1929.82) -2377.54,1943.84 ; RP2.3@-2390.31,1935.6 cw(c-2377.54,1929.82) -2377.54,1943.84 ; RP2.3@-2390.31,1952.09 ccw(c-2377.54,1957.87) -2377.54,1943.84 ; RP2.3@-2390.31,1952.09 ccw(c-2377.54,1957.87) -2377.54,1943.84 ; RP2.3@-2390.31,1952.09 ccw(c-2377.54,1957.87) -2377.54,1943.84 ; RP2.3@-2390.31,1952.09 ccw(c-2377.54,1957.87) -2377.54,1943.84 ; RP2.3@-2390.31,1952.09 ccw(c-2377.54,1957.87) -2377.54,1943.84 ; RP2.3@-2390.31,1952.09 ccw(c-2377.54,1957.87) -2377.54,1943.84 ; RP2.3@-2390.31,1952.09 ccw(c-2377.54,1957.87) -2377.54,1943.84 ; RP2.3@-2390.31,1952.09 ccw(c-2377.54,1957.87) -2377.54,1943.84 ; RP2.3@-2390.31,1952.09 ccw(c-2377.54,1957.87) -2377.54,1943.84
NetR8_1: R8.1 RP3.3 | length 1708.9
  TopLayer w10: R8.1@-1615.62,1751.88 -1570.5,1751.88 -1543.54,1778.84 -1543.54,1917.84 -1572.57,1946.88 ; RP3.3@-1600.93,1956.8 cw(c-1596.57,1923.77) -1573.02,1947.32 ; RP3.3@-1598.32,1936.97 cw(c-1589.89,1873.11) -1544.35,1918.66 ; -1558.68,1932.99 ccw(c-1593.23,1898.44) RP3.3@-1599.62,1946.88 ; R8.1@-1608.55,1744.81 cw(c-1591.48,1727.74) -1591.48,1751.88 ; R8.1@-1608.55,1744.81 cw(c-1591.48,1727.74) -1591.48,1751.88 ; R8.1@-1608.55,1744.81 cw(c-1591.48,1727.74) -1591.48,1751.88 ; R8.1@-1608.55,1744.81 cw(c-1591.48,1727.74) -1591.48,1751.88 ; R8.1@-1608.55,1744.81 cw(c-1591.48,1727.74) -1591.48,1751.88 ; R8.1@-1608.55,1744.81 cw(c-1591.48,1727.74) -1591.48,1751.88 ; R8.1@-1608.55,1744.81 cw(c-1591.48,1727.74) -1591.48,1751.88 ; R8.1@-1608.55,1744.81 cw(c-1591.48,1727.74) -1591.48,1751.88 ; R8.1@-1608.55,1744.81 cw(c-1591.48,1727.74) -1591.48,1751.88 ; R8.1@-1608.55,1758.95 ccw(c-1591.48,1776.02) -1591.48,1751.88 ; R8.1@-1608.55,1758.95 ccw(c-1591.48,1776.02) -1591.48,1751.88 ; R8.1@-1608.55,1758.95 ccw(c-1591.48,1776.02) -1591.48,1751.88 ; R8.1@-1608.55,1758.95 ccw(c-1591.48,1776.02) -1591.48,1751.88 ; R8.1@-1608.55,1758.95 ccw(c-1591.48,1776.02) -1591.48,1751.88 ; R8.1@-1608.55,1758.95 ccw(c-1591.48,1776.02) -1591.48,1751.88 ; R8.1@-1608.55,1758.95 ccw(c-1591.48,1776.02) -1591.48,1751.88 ; R8.1@-1608.55,1758.95 ccw(c-1591.48,1776.02) -1591.48,1751.88 ; R8.1@-1608.55,1758.95 ccw(c-1591.48,1776.02) -1591.48,1751.88 ; RP3.3@-1599.62,1946.88 cw(c-1586.12,1932) -1571.9,1946.21 ; RP3.3@-1599.62,1946.88 cw(c-1586.12,1932) -1571.9,1946.21 ; RP3.3@-1599.62,1946.88 cw(c-1586.12,1932) -1571.9,1946.21 ; RP3.3@-1599.62,1946.88 cw(c-1586.12,1932) -1571.9,1946.21 ; RP3.3@-1599.62,1946.88 cw(c-1586.12,1932) -1571.9,1946.21 ; RP3.3@-1599.62,1946.88 cw(c-1586.12,1932) -1571.9,1946.21 ; RP3.3@-1599.62,1946.88 cw(c-1586.12,1932) -1571.9,1946.21 ; RP3.3@-1599.62,1946.88 cw(c-1586.12,1932) -1571.9,1946.21 ; RP3.3@-1599.62,1946.88 -1572.57,1946.88 ; RP3.3@-1592.9,1939.48 cw(c-1579.05,1924.22) -1564.48,1938.79 ; RP3.3@-1592.9,1939.48 cw(c-1579.05,1924.22) -1564.48,1938.79 ; RP3.3@-1592.9,1939.48 cw(c-1579.05,1924.22) -1564.48,1938.79 ; RP3.3@-1592.9,1939.48 cw(c-1579.05,1924.22) -1564.48,1938.79 ; RP3.3@-1592.9,1939.48 cw(c-1579.05,1924.22) -1564.48,1938.79 ; RP3.3@-1592.9,1939.48 cw(c-1579.05,1924.22) -1564.48,1938.79 ; RP3.3@-1592.9,1939.48 cw(c-1579.05,1924.22) -1564.48,1938.79 ; RP3.3@-1592.9,1939.48 cw(c-1579.05,1924.22) -1564.48,1938.79 ; RP3.3@-1586.18,1932.07 cw(c-1571.99,1916.44) -1557.06,1931.37 ; RP3.3@-1586.18,1932.07 cw(c-1571.99,1916.44) -1557.06,1931.37 ; RP3.3@-1586.18,1932.07 cw(c-1571.99,1916.44) -1557.06,1931.37 ; RP3.3@-1586.18,1932.07 cw(c-1571.99,1916.44) -1557.06,1931.37 ; RP3.3@-1586.18,1932.07 cw(c-1571.99,1916.44) -1557.06,1931.37 ; RP3.3@-1586.18,1932.07 cw(c-1571.99,1916.44) -1557.06,1931.37 ; RP3.3@-1586.18,1932.07 cw(c-1571.99,1916.44) -1557.06,1931.37 ; RP3.3@-1586.18,1932.07 cw(c-1571.99,1916.44) -1557.06,1931.37 ; RP3.3@-1580.5,1941.02 cw(c-1572.58,1938.59) -1572.58,1946.88 ; RP3.3@-1580.5,1941.02 cw(c-1572.58,1938.59) -1572.58,1946.88 ; RP3.3@-1580.5,1941.02 cw(c-1572.58,1938.59) -1572.58,1946.88 ; RP3.3@-1580.5,1941.02 cw(c-1572.58,1938.59) -1572.58,1946.88 ; RP3.3@-1580.5,1941.02 cw(c-1572.58,1938.59) -1572.58,1946.88 ; RP3.3@-1580.5,1941.02 cw(c-1572.58,1938.59) -1572.58,1946.88 ; RP3.3@-1580.5,1941.02 cw(c-1572.58,1938.59) -1572.58,1946.88 ; RP3.3@-1580.5,1941.02 cw(c-1572.58,1938.59) -1572.58,1946.88 ; RP3.3@-1580.5,1941.02 cw(c-1572.58,1938.59) -1572.58,1946.88 ; RP3.3@-1580.5,1952.74 ccw(c-1572.58,1955.17) -1572.58,1946.88 ; RP3.3@-1580.5,1952.74 ccw(c-1572.58,1955.17) -1572.58,1946.88 ; RP3.3@-1580.5,1952.74 ccw(c-1572.58,1955.17) -1572.58,1946.88 ; RP3.3@-1580.5,1952.74 ccw(c-1572.58,1955.17) -1572.58,1946.88 ; RP3.3@-1580.5,1952.74 ccw(c-1572.58,1955.17) -1572.58,1946.88 ; RP3.3@-1580.5,1952.74 ccw(c-1572.58,1955.17) -1572.58,1946.88 ; RP3.3@-1580.5,1952.74 ccw(c-1572.58,1955.17) -1572.58,1946.88 ; RP3.3@-1580.5,1952.74 ccw(c-1572.58,1955.17) -1572.58,1946.88 ; RP3.3@-1580.5,1952.74 ccw(c-1572.58,1955.17) -1572.58,1946.88
NetR9_1: R9.1 RP4.3 | length 1322.2
  TopLayer w10: RP4.3@-858.54,1948.84 -807.54,1948.84 -783.54,1924.84 -783.54,1771.84 -803.5,1751.88 R9.1@-835.62,1751.88 ; RP4.3@-844.39,1934.7 cw(c-810.25,1900.56) -810.25,1948.84 ; RP4.3@-844.39,1934.7 cw(c-810.25,1900.56) -810.25,1948.84 ; RP4.3@-844.39,1934.7 cw(c-810.25,1900.56) -810.25,1948.84 ; RP4.3@-844.39,1934.7 cw(c-810.25,1900.56) -810.25,1948.84 ; RP4.3@-844.39,1934.7 cw(c-810.25,1900.56) -810.25,1948.84 ; RP4.3@-844.39,1934.7 cw(c-810.25,1900.56) -810.25,1948.84 ; RP4.3@-844.39,1934.7 cw(c-810.25,1900.56) -810.25,1948.84 ; RP4.3@-844.39,1934.7 cw(c-810.25,1900.56) -810.25,1948.84 ; RP4.3@-844.39,1934.7 cw(c-810.25,1900.56) -810.25,1948.84 ; RP4.3@-844.39,1962.98 ccw(c-810.25,1997.13) -810.25,1948.84 ; RP4.3@-844.39,1962.98 ccw(c-810.25,1997.13) -810.25,1948.84 ; RP4.3@-844.39,1962.98 ccw(c-810.25,1997.13) -810.25,1948.84 ; RP4.3@-844.39,1962.98 ccw(c-810.25,1997.13) -810.25,1948.84 ; RP4.3@-844.39,1962.98 ccw(c-810.25,1997.13) -810.25,1948.84 ; RP4.3@-844.39,1962.98 ccw(c-810.25,1997.13) -810.25,1948.84 ; RP4.3@-844.39,1962.98 ccw(c-810.25,1997.13) -810.25,1948.84 ; RP4.3@-844.39,1962.98 ccw(c-810.25,1997.13) -810.25,1948.84 ; RP4.3@-844.39,1962.98 ccw(c-810.25,1997.13) -810.25,1948.84 ; R9.1@-828.55,1744.81 cw(c-811.48,1727.74) -811.48,1751.88 ; R9.1@-828.55,1744.81 cw(c-811.48,1727.74) -811.48,1751.88 ; R9.1@-828.55,1744.81 cw(c-811.48,1727.74) -811.48,1751.88 ; R9.1@-828.55,1744.81 cw(c-811.48,1727.74) -811.48,1751.88 ; R9.1@-828.55,1744.81 cw(c-811.48,1727.74) -811.48,1751.88 ; R9.1@-828.55,1744.81 cw(c-811.48,1727.74) -811.48,1751.88 ; R9.1@-828.55,1744.81 cw(c-811.48,1727.74) -811.48,1751.88 ; R9.1@-828.55,1744.81 cw(c-811.48,1727.74) -811.48,1751.88 ; R9.1@-828.55,1744.81 cw(c-811.48,1727.74) -811.48,1751.88 ; R9.1@-828.55,1758.95 ccw(c-811.48,1776.02) -811.48,1751.88 ; R9.1@-828.55,1758.95 ccw(c-811.48,1776.02) -811.48,1751.88 ; R9.1@-828.55,1758.95 ccw(c-811.48,1776.02) -811.48,1751.88 ; R9.1@-828.55,1758.95 ccw(c-811.48,1776.02) -811.48,1751.88 ; R9.1@-828.55,1758.95 ccw(c-811.48,1776.02) -811.48,1751.88 ; R9.1@-828.55,1758.95 ccw(c-811.48,1776.02) -811.48,1751.88 ; R9.1@-828.55,1758.95 ccw(c-811.48,1776.02) -811.48,1751.88 ; R9.1@-828.55,1758.95 ccw(c-811.48,1776.02) -811.48,1751.88 ; R9.1@-828.55,1758.95 ccw(c-811.48,1776.02) -811.48,1751.88
NetR14_1: R14.1 U3.13 | length 751.9
  TopLayer w10: U3.13@-3521.62,1813.88 -3521.62,1773.93 -3452.54,1704.84 -3404.54,1704.84 -3324.54,1624.84 -3324.54,1571.84 -3300.57,1547.88 R14.1@-3275.62,1547.88 ; -3299.76,1547.88 cw(c-3299.76,1523.74) R14.1@-3282.69,1540.81 ; -3299.76,1547.88 ccw(c-3299.76,1572.02) R14.1@-3282.69,1554.95 ; -3299.76,1547.88 cw(c-3299.76,1523.74) R14.1@-3282.69,1540.81 ; -3299.76,1547.88 ccw(c-3299.76,1572.02) R14.1@-3282.69,1554.95 ; -3299.76,1547.88 cw(c-3299.76,1523.74) R14.1@-3282.69,1540.81 ; -3299.76,1547.88 ccw(c-3299.76,1572.02) R14.1@-3282.69,1554.95 ; -3299.76,1547.88 cw(c-3299.76,1523.74) R14.1@-3282.69,1540.81 ; -3299.76,1547.88 ccw(c-3299.76,1572.02) R14.1@-3282.69,1554.95 ; -3299.76,1547.88 cw(c-3299.76,1523.74) R14.1@-3282.69,1540.81 ; -3299.76,1547.88 ccw(c-3299.76,1572.02) R14.1@-3282.69,1554.95 ; -3299.76,1547.88 ccw(c-3299.76,1572.02) R14.1@-3282.69,1554.95 ; -3299.76,1547.88 cw(c-3299.76,1523.74) R14.1@-3282.69,1540.81 ; -3299.76,1547.88 ccw(c-3299.76,1572.02) R14.1@-3282.69,1554.95 ; -3299.76,1547.88 cw(c-3299.76,1523.74) R14.1@-3282.69,1540.81 ; -3299.76,1547.88 ccw(c-3299.76,1572.02) R14.1@-3282.69,1554.95 ; -3299.76,1547.88 cw(c-3299.76,1523.74) R14.1@-3282.69,1540.81 ; -3299.76,1547.88 ccw(c-3299.76,1572.02) R14.1@-3282.69,1554.95 ; -3299.76,1547.88 cw(c-3299.76,1523.74) R14.1@-3282.69,1540.81